# EAGLE board statim board (EAGLE 9.5.2)
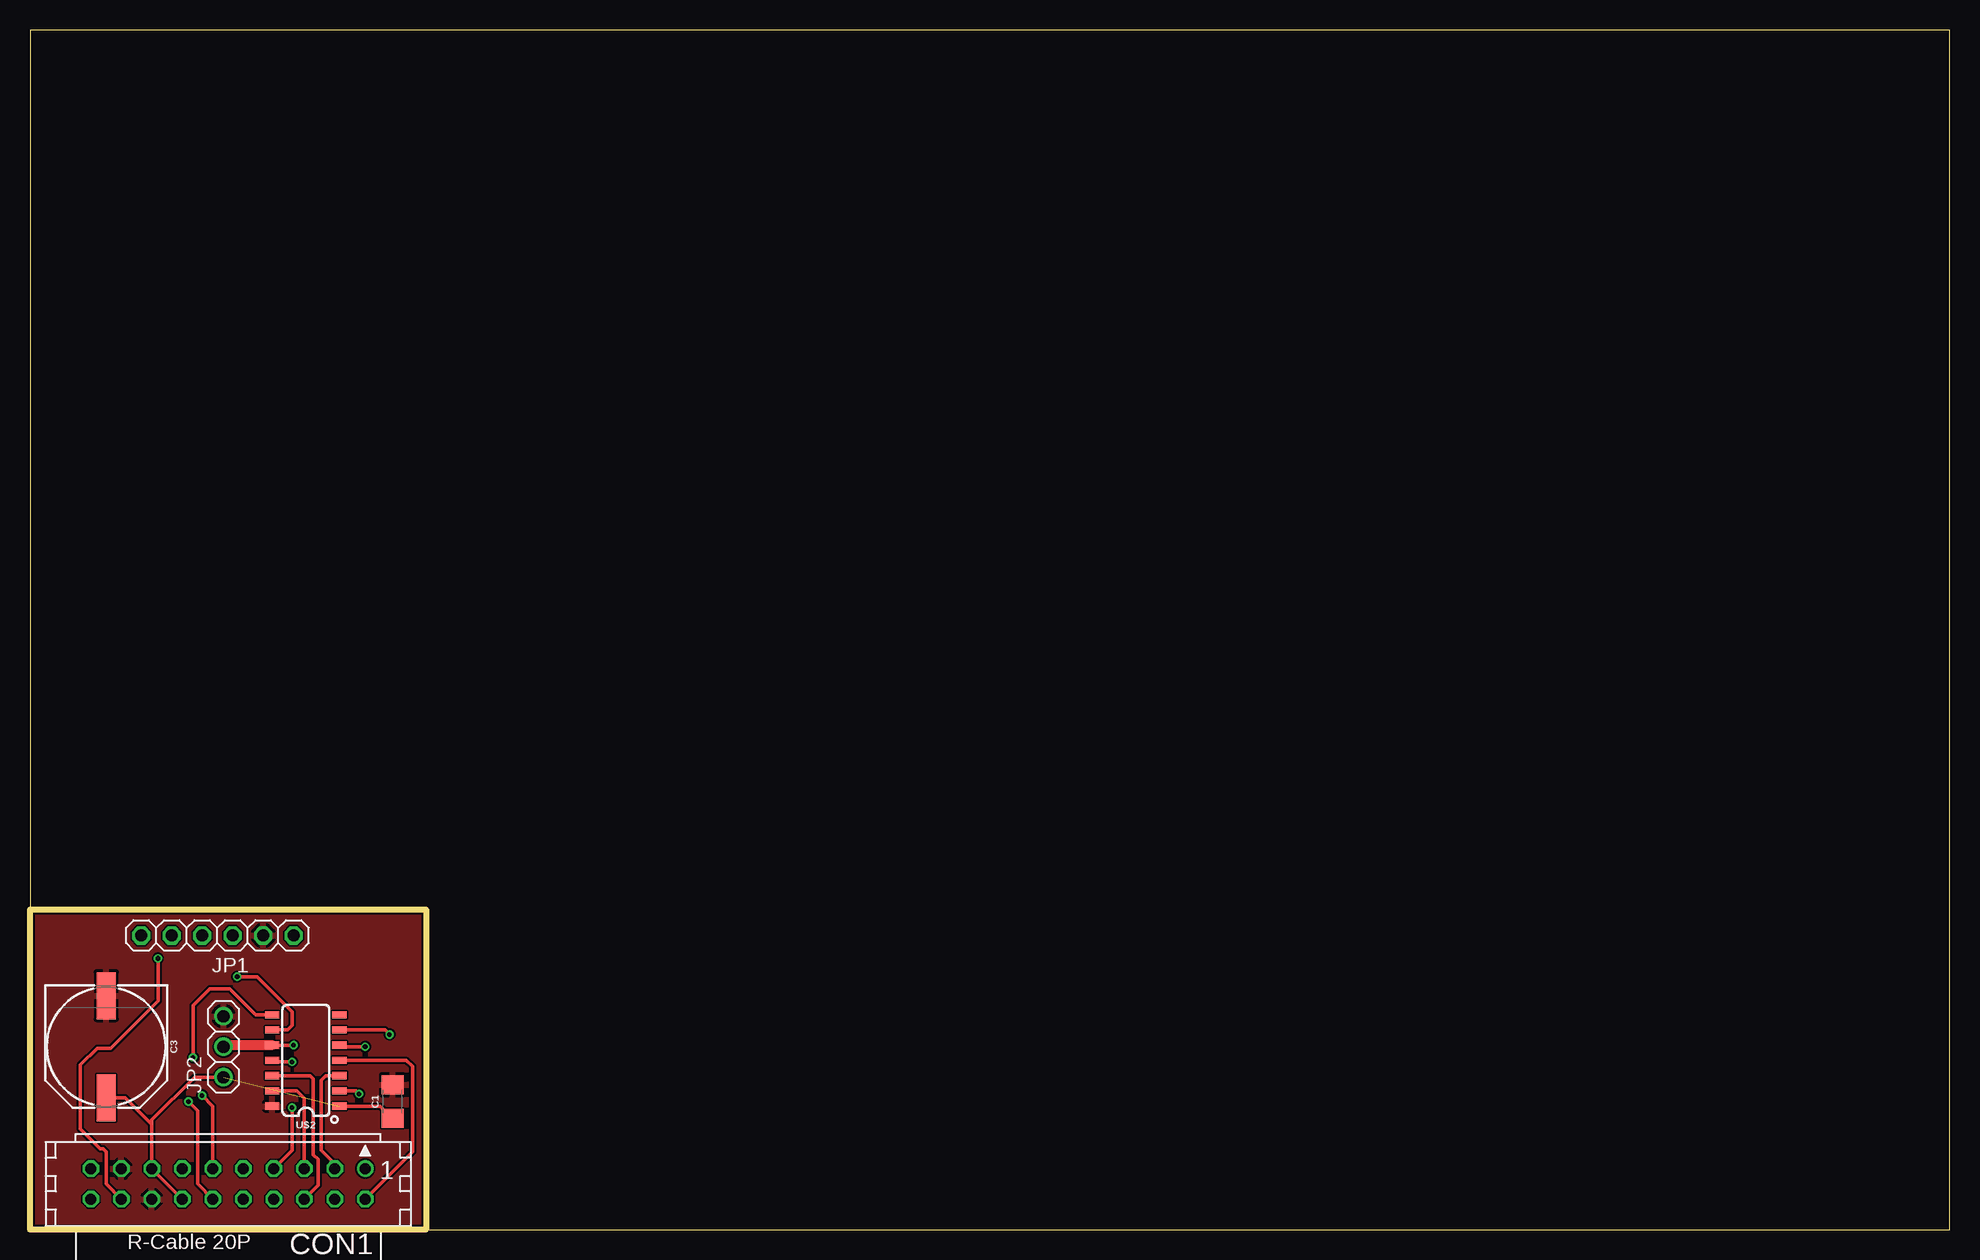
[diagram p0: board, top side]
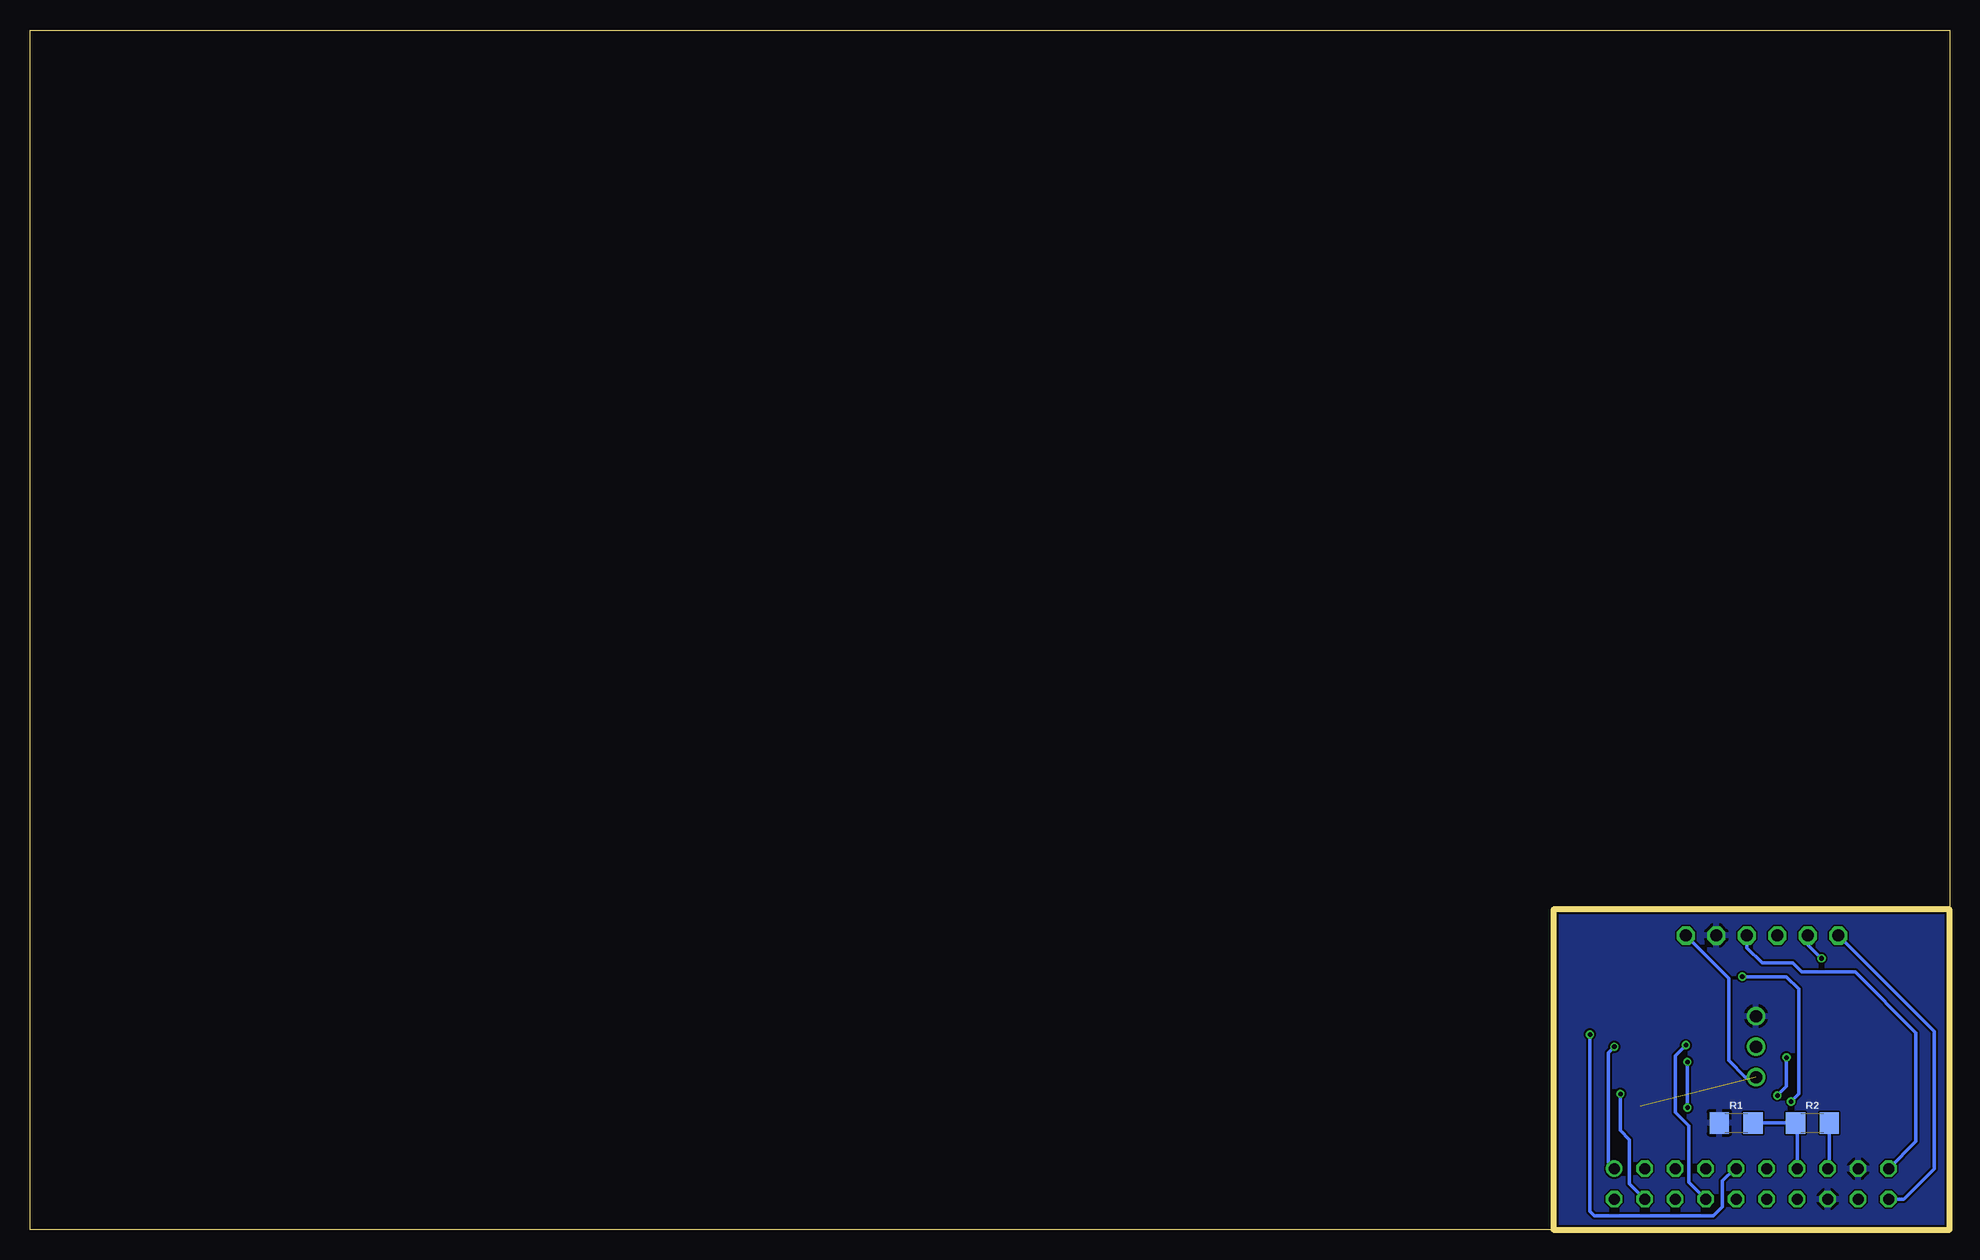
[diagram p1: board, bottom side, seen from below]

Size 160 x 100 mm. Coordinates in mm from the lower left corner, seen from the top.
Outline: 33.02,0 160,0 160,100 0,100 0,26.67
Outline: 0,26.67 0,0 33.02,0
Outline: 0,26.67 33.02,26.67 33.02,0
Copper layers (1*16): Top 0.035mm / dielectric 1.5mm / Bottom 0.035mm
Design rules "SparkFun-2-layer-PCBWay-LIMIT": minimum track width 6mil, minimum drill 0.3mm, track to track 6mil, track to pad 6mil, pad to pad 6mil, via to via 6mil, smd to smd 6mil, copper to edge 6mil, drill to drill 6mil, minimum pad ring 6mil, minimum via ring 6mil, stop-mask expansion 4mil, vias tented up to drill 25mil, thermal gap 10mil

## Footprints (pad centres in the part's own frame; a part is rotated, then mirrored left to right if it is on the bottom)
1206 = smd 1.6 x 1.8: 1 -1.4,0; 2 1.4,0
PANASONIC_G = smd 3.9 x 1.6: + 4.25,0; - -4.25,0
CON20 = drill 0.914: 1 -11.43,-1.27 | drill 0.914 octagon: 2 -11.43,1.27; 3 -8.89,-1.27; 4 -8.89,1.27; 5 -6.35,-1.27; 6 -6.35,1.27; 7 -3.81,-1.27; 8 -3.81,1.27; 9 -1.27,-1.27; 10 -1.27,1.27; 11 1.27,-1.27; 12 1.27,1.27; 13 3.81,-1.27; 14 3.81,1.27; 15 6.35,-1.27; 16 6.35,1.27; 17 8.89,-1.27; 18 8.89,1.27; 19 11.43,-1.27; 20 11.43,1.27
1X06 = drill 1.016 octagon: 1 -6.35,0; 2 -3.81,0; 3 -1.27,0; 4 1.27,0; 5 3.81,0; 6 6.35,0
1X03 = drill 1.016: 1 -2.54,0; 2 0,0; 3 2.54,0
SO14 = smd 0.6 x 1.2: 1 -3.175,-2.8; 2 -1.905,-2.8; 3 -0.635,-2.8; 4 0.635,-2.8; 5 1.905,-2.8; 6 3.175,-2.8; 7 4.445,-2.8; 8 4.445,2.8; 9 3.175,2.8; 10 1.905,2.8; 11 0.635,2.8; 12 -0.635,2.8; 13 -1.905,2.8; 14 -3.175,2.8

## Placement (x,y rotation side)
C1  0.1uF  [1206]  30.23,10.67 90 top
C3  470uF  [PANASONIC_G]  6.35,15.24 270 top
CON1  [CON20]  16.51,3.81 180 top
JP1  [1X06]  15.62,24.51 180 top
JP2  [1X03]  16.13,15.24 90 top
R1  10  [1206]  17.78,8.89 0 bottom
R2  10  [1206]  11.43,8.89 0 bottom
U$2  ATTINY84ATTINY204  [SO14]  22.99,13.46 90 top

## Library data of the parts
C1 = SparkFun-Capacitors; PROD_ID: CAP-09822
C3 = SparkFun-Capacitors; PROD_ID: CAP-09983
CON1 = con-harting; OC_FARNELL: unknown; OC_NEWARK: unknown
JP1 JP2 = adafruit
R1 R2 = SparkFun-Resistors; PROD_ID: RES-08705
U$2 = ATTINY204

## Nets
BUSY: CON1.11 U$2.8
DATA0: CON1.8 JP2.2 U$2.10
DATA1: CON1.7 U$2.11
DATA2: CON1.6 U$2.12
DATA3: CON1.5 U$2.13
DATA4: CON1.4 U$2.2
DATA5: CON1.3 U$2.3
DATA6: CON1.2 U$2.4
DATA7: CON1.1 U$2.5
GND: C1.2 C3.- CON1.16 CON1.17 JP1.2 JP2.3 R1.1 U$2.14
MISO_RTC: CON1.19 JP1.3
NACK: CON1.12 U$2.9
SCK_CS: CON1.20 JP1.6
SCK_RTC: CON1.18 JP1.5
STROBE: CON1.9 U$2.6
TX: U$2.7
VCC: C1.1 C3.+ CON1.14 CON1.15 JP1.1 JP2.1 R2.2 U$2.1
VCC/2: CON1.13 R1.2 R2.1

## Tracks (layer width: path | path; a pad name or v marks a point on that pad's centre or on a via)
BUSY  (via drill 0.38)
  Top 0.305: v13.59,14.35 13.59,18.67 14.99,20.07 16.64,20.07 18.8,17.91 U$2.8 | v14.35,11.18 15.24,10.29 CON1.11
  Bottom 0.305: v13.59,14.35 13.59,11.94 v14.35,11.18
DATA0  (via drill 0.38)
  Top 0.305: v21.97,15.37 U$2.10
  Top 0.813: U$2.10 16.26,15.37 JP2.2
  Bottom 0.305: CON1.8 21.72,3.94 21.72,8.64 22.86,9.78 22.86,14.48 v21.97,15.37
DATA1  (via drill 0.38)
  Top 0.305: v21.84,13.97 20.31,13.97 U$2.11 | CON1.7 21.84,6.6 v21.84,10.16
  Bottom 0.305: v21.84,10.16 v21.84,13.97
DATA2
  Top 0.305: CON1.6 24,3.68 24,5.84 23.62,6.22 23.62,12.57 23.37,12.83 U$2.12
DATA3
  Top 0.305: U$2.13 22.23,11.56 22.86,10.92 CON1.5
DATA4  (via drill 0.38)
  Top 0.305: v27.43,11.3 27.18,11.56 U$2.2
  Bottom 0.305: CON1.4 26.67,3.81 26.67,7.49 27.43,8.26 v27.43,11.3
DATA5
  Top 0.305: CON1.3 25.4,5.46 24.26,6.6 24.26,12.45 24.64,12.83 U$2.3
DATA6
  Top 0.305: CON1.2 31.88,6.48 31.88,12.7 31.88,13.08 31.88,13.59 31.37,14.1 U$2.4
DATA7  (via drill 0.38)
  Top 0.305: v27.94,15.24 25.91,15.24 U$2.5
  Bottom 0.305: CON1.1 28.45,5.59 28.45,14.73 v27.94,15.24
GND
  pour Top: 0,0 0,26.67 33.02,26.67 33.02,0
  pour Bottom: 0,0 0,26.67 33.02,26.67 33.02,0
MISO_RTC
  Bottom 0.305: CON1.19 2.79,7.37 2.79,16.38 7.87,21.46 12.32,21.46 13.08,22.23 15.62,22.23 16.89,23.5 JP1.3
NACK  (via drill 0.38)
  Top 0.305: CON1.12 13.97,3.81 13.97,9.91 v13.21,10.67 | v17.27,21.08 18.92,21.08 21.84,18.16 21.84,17.02 21.46,16.64 U$2.9
  Bottom 0.305: v13.21,10.67 12.57,11.3 12.57,20.07 13.59,21.08 v17.27,21.08
SCK_CS
  Bottom 0.305: JP1.6 1.27,16.51 1.27,5.08 3.81,2.54 CON1.20
SCK_RTC  (via drill 0.38)
  Top 0.305: v10.67,22.61 10.67,19.05 6.73,15.11 5.59,15.11 4.19,13.72 4.19,8.38 5.84,6.73 6.1,6.73 6.35,6.48 6.35,3.81 CON1.18
  Bottom 0.305: JP1.5 11.81,23.75 v10.67,22.61
STROBE  (via drill 0.38)
  Top 0.305: U$2.6 29.59,16.64 v29.97,16.26
  Bottom 0.305: v29.97,16.26 29.97,1.52 29.59,1.14 19.68,1.14 18.92,1.91 18.92,4.06 17.91,5.08 CON1.9
VCC  (1 unrouted)
  Top 0.305: U$2.1 29.21,10.29 C1.1 | C3.+ 7.93,10.99 10.16,8.76 CON1.15 | CON1.15 10.16,9.14 13.72,12.7 JP2.1 | CON1.14 CON1.15
  Bottom 0.305: CON1.15 10.03,5.21 R2.2 | JP1.1 18.41,20.95 18.41,14.1 17.02,12.7 JP2.1
VCC/2
  Bottom 0.305: CON1.13 12.7,8.76 R2.1 R1.2